# EAGLE board Fingerprint_lock1_1 (EAGLE 9.6.2)
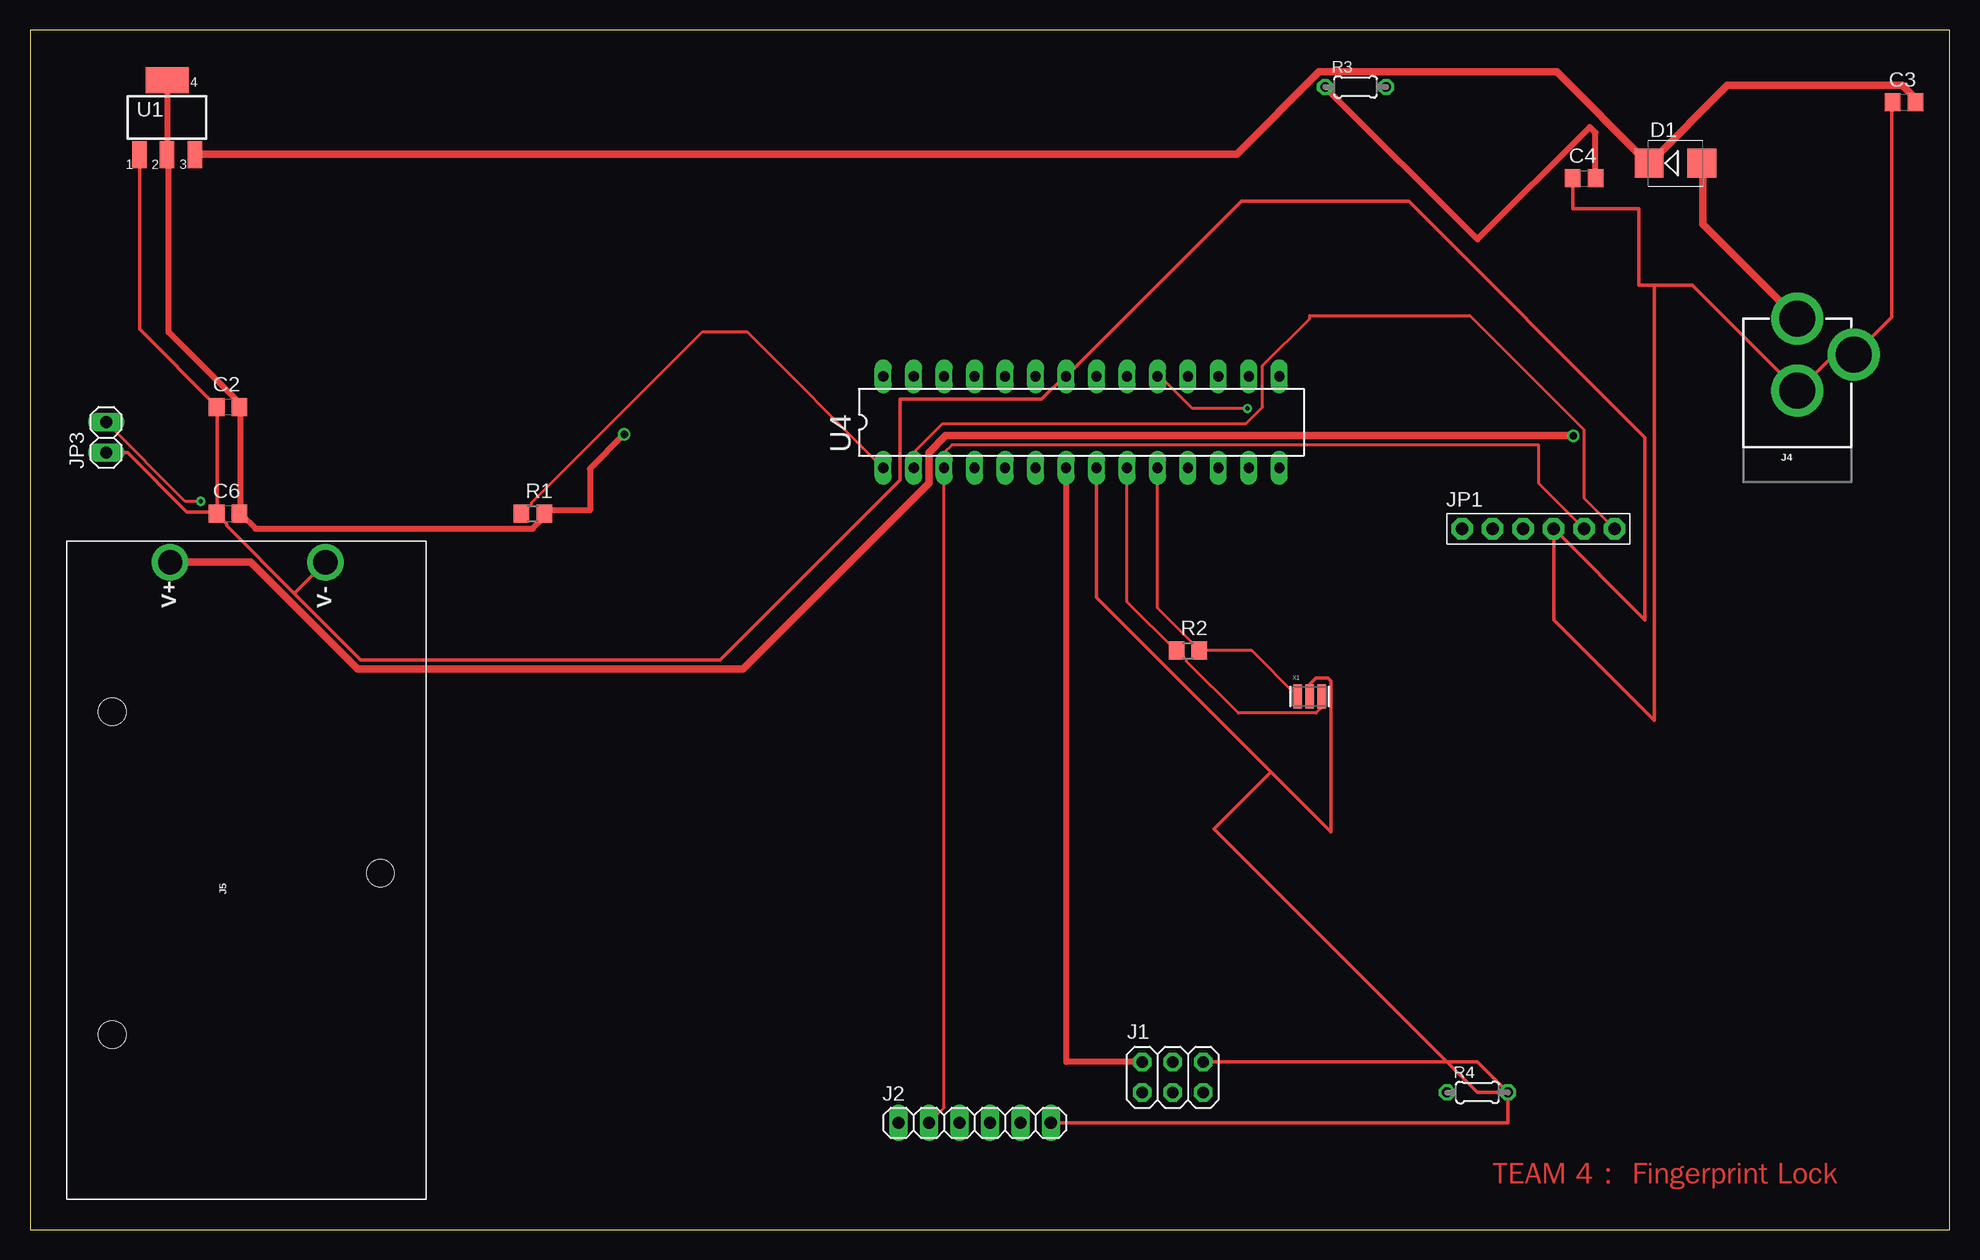
[diagram p0: board, top side]
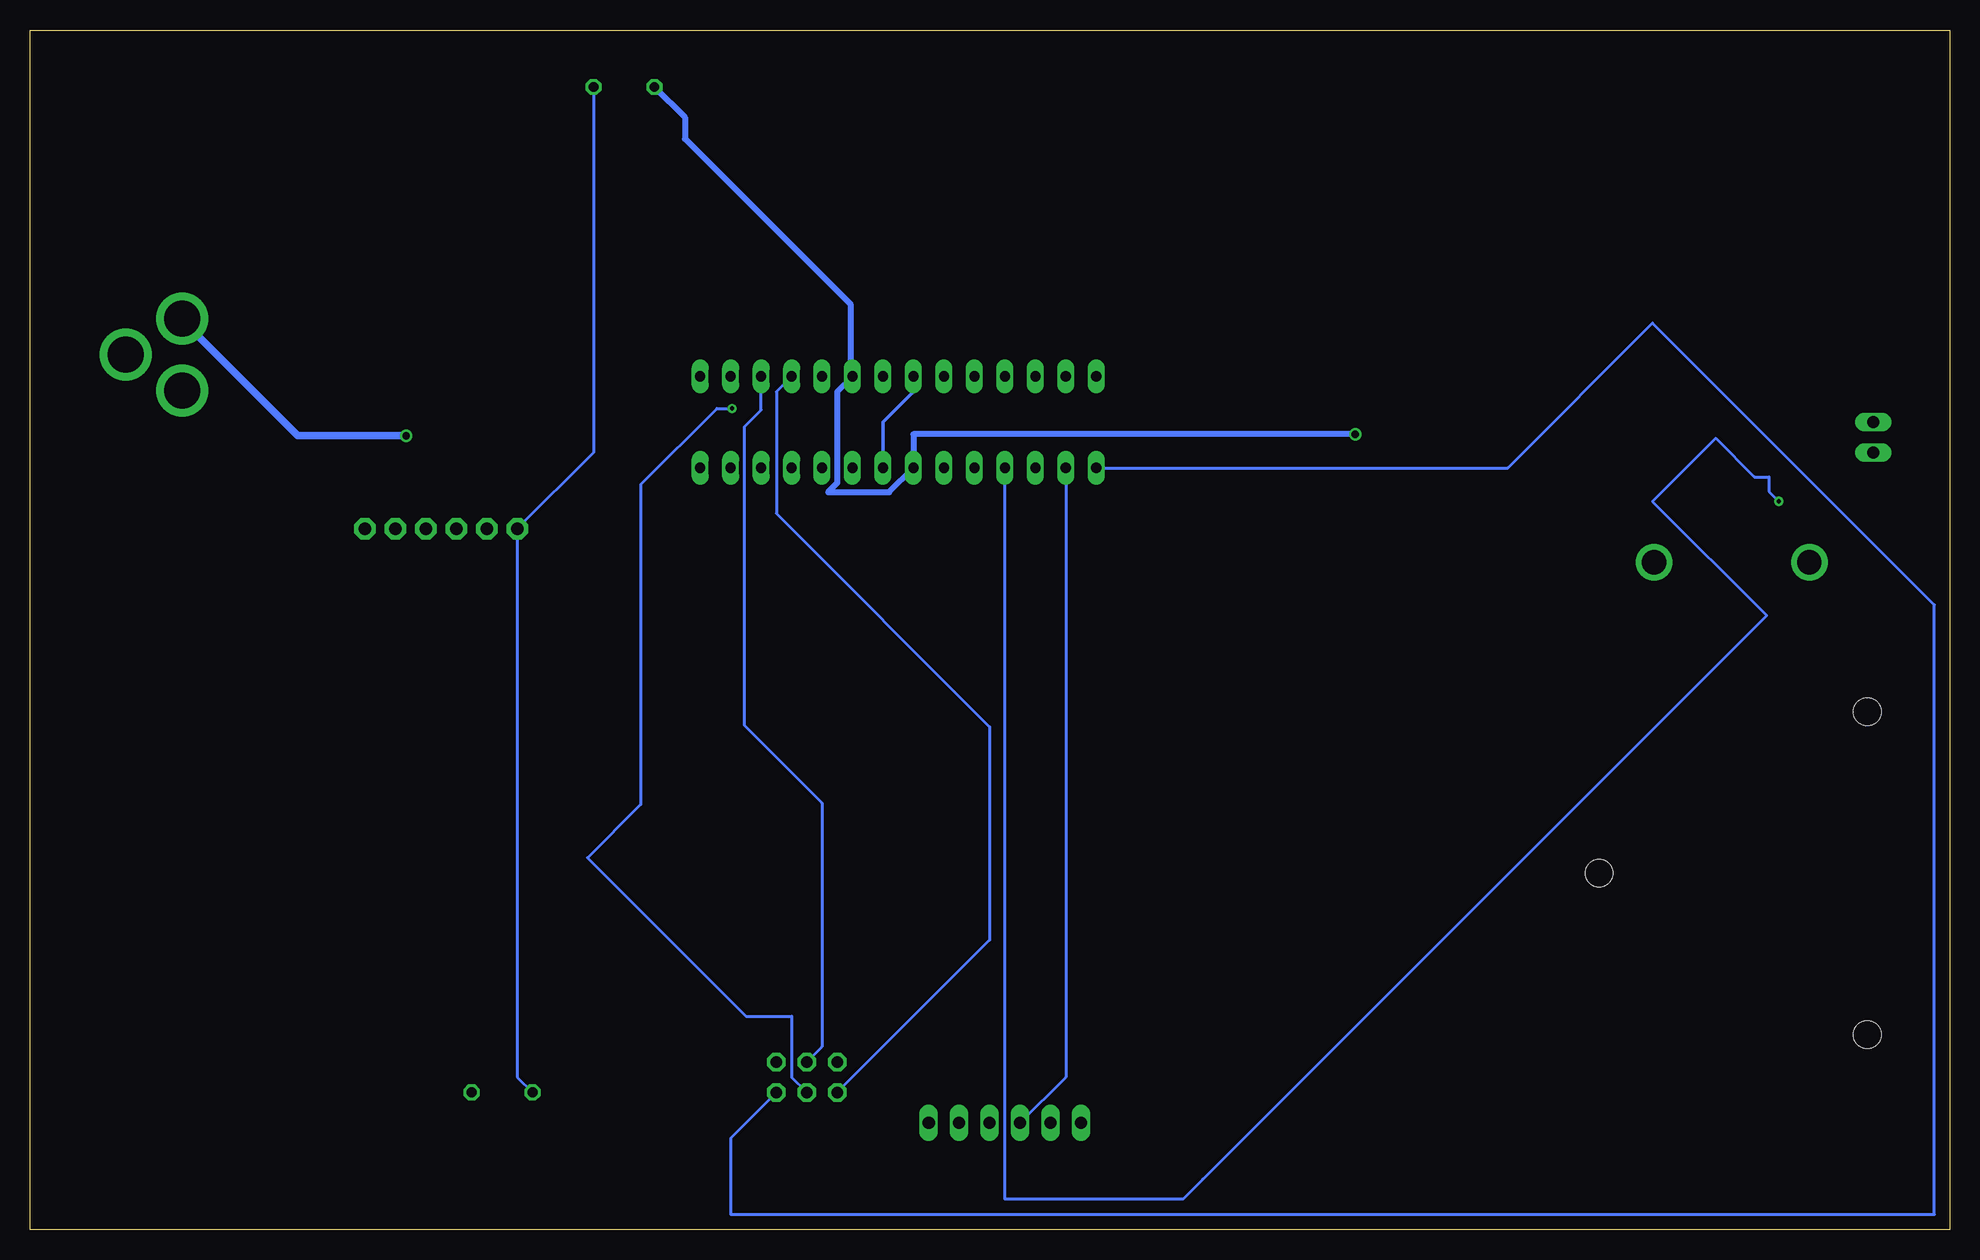
[diagram p1: board, bottom side, seen from below]

Size 160 x 100 mm. Coordinates in mm from the lower left corner, seen from the top.
Outline: 0,0 160,0 160,100 0,100 0,0
Copper layers (1*16): Top 0.035mm / dielectric 1.5mm / Bottom 0.035mm
Design rules "default": minimum track width 6mil, minimum drill 0.35mm, track to track 6mil, track to pad 6mil, pad to pad 6mil, via to via 6mil, smd to smd 6mil, copper to edge 40mil, drill to drill 6mil, minimum pad ring 10mil, minimum via ring 8mil, stop-mask expansion 4mil, vias tented up to drill 0mil, thermal gap 10mil
Net classes: 0 default: width 0.254 mm, clearance 0.254 mm; 1 power: width 0.61 mm, drill 0.61 mm, clearance 0.254 mm; 2 gnd: width 0.305 mm, drill 0.559 mm, clearance 0.254 mm; 3 usbvcc: width 0.508 mm, drill 0.61 mm, clearance 0.254 mm

## Footprints (pad centres in the part's own frame; a part is rotated, then mirrored left to right if it is on the bottom)
C0805 = smd 1.3 x 1.5: 1 -0.95,0; 2 0.95,0
SMB = smd 2.4 x 2.4: A 2.2,0; C -2.2,0
2X03 = drill 0.95 pad 1.55 octagon: 1 -2.54,-1.27; 2 -2.54,1.27; 3 0,-1.27; 4 0,1.27; 5 2.54,-1.27; 6 2.54,1.27
1X06 = drill 1.016 long: 1 -6.35,0; 2 -3.81,0; 3 -1.27,0; 4 1.27,0; 5 3.81,0; 6 6.35,0
POWER_JACK_PTH = drill 2.997 pad 4.318: GND 0,7.7; GNDBREAK 4.7,10.7; PWR 0,13.7
BC9VPC = drill 2.032: V+ 53.086,21.336; V- 53.086,8.382 | hole 2.286: 27.178,3.81; 13.716,26.162; 40.64,26.162
1X06-BIG = drill 1.016 pad 1.778 octagon: 1 -6.35,0; 2 -3.81,0; 3 -1.27,0; 4 1.27,0; 5 3.81,0; 6 6.35,0
1X02 = drill 1.016 long: 1 -1.27,0; 2 1.27,0
R0805 = smd 1.3 x 1.5: 1 -0.95,0; 2 0.95,0
0204/5 = drill 0.813 octagon: 1 -2.54,0; 2 2.54,0
SOT223 = smd 1.219 x 2.235: 1 -2.311,-3.099; 2 0,-3.099; 3 2.311,-3.099 | smd 3.6 x 2.2: 4 0,3.099
DIL28-3 = drill 0.85 pad 1.422 long: 1 -16.51,-3.81; 2 -13.97,-3.81; 3 -11.43,-3.81; 4 -8.89,-3.81; 5 -6.35,-3.81; 6 -3.81,-3.81; 7 -1.27,-3.81; 8 1.27,-3.81; 9 3.81,-3.81; 10 6.35,-3.81; 11 8.89,-3.81; 12 11.43,-3.81; 13 13.97,-3.81; 14 16.51,-3.81; 15 16.51,3.81; 16 13.97,3.81; 17 11.43,3.81; 18 8.89,3.81; 19 6.35,3.81; 20 3.81,3.81; 21 1.27,3.81; 22 -1.27,3.81; 23 -3.81,3.81; 24 -6.35,3.81; 25 -8.89,3.81; 26 -11.43,3.81; 27 -13.97,3.81; 28 -16.51,3.81
RESONATOR = smd 0.7 x 2: 1 -1,0; 2 0,0; 3 1,0

## Placement (x,y rotation side)
C2  100n  [C0805]  16.51,68.58 0 top
C3  47u  [C0805]  156.21,93.98 0 top
C4  47u  [C0805]  129.54,87.63 0 top
C6  100n  [C0805]  16.51,59.69 0 top
D1  M7  [SMB]  137.16,88.9 0 top
J1  3x2 M  [2X03]  95.25,12.7 0 top
J2  [1X06]  78.74,8.89 0 top
J4  POWER_JACK  [POWER_JACK_PTH]  147.32,62.23 0 top
J5  [BC9VPC]  33.02,2.54 90 top
JP1  [1X06-BIG]  125.73,58.42 0 top
JP3  [1X02]  6.35,66.04 90 top
R1  10K  [R0805]  41.91,59.69 0 top
R2  1M  [R0805]  96.52,48.26 0 top
R3  5K  [0204/5]  110.49,95.25 0 top
R4  10K  [0204/5]  120.65,11.43 0 top
U1  NCP1117ST50T3G  [SOT223]  11.43,92.71 0 top
U4  ATMEGA328P-PU  [DIL28-3]  87.63,67.31 0 top
X1  CSTCE16M0V53-R0 16MHZ  [RESONATOR]  106.68,44.45 0 top

## Library data of the parts
C2-C4 C6 = rcl; SPICEPREFIX: C
D1 = diode
J1 U4 X1 = SmartPrj
J2 JP3 = pinhead
J4 = SparkFun-Connectors; PROD_ID: CONN-08197
J5 = SparkFun-Connectors; PROD_ID: BATT-10855
JP1 = adafruit
R1-R4 = rcl; SPICEPREFIX: R
U1 = linear

## Nets
+5V [usbvcc]: C2.2 C4.2 C6.2 J1.2 R1.2 R3.1 U1.2 U1.4 U4.7 U4.20
GND [gnd]: C2.1 C3.1 C4.1 C6.1 J1.6 J2.6 J4.GND J4.GNDBREAK J5.V- JP1.4 JP3.1 R4.2 U1.1 U4.8 U4.22 X1.2
MISO: J1.1 U4.18
MOSI: J1.4 U4.17
N$4: JP1.1 R3.2 R4.1
PWRIN [power]: D1.A J4.PWR J5.V+
RESET: J1.5 R1.1 U4.1
RXD: J2.3 JP1.6 U4.2
SCK: J1.3 U4.19
SLOCK: JP3.2 U4.4
TXD: J2.2 JP1.5 U4.3
VIN [power]: C3.2 D1.C U1.3
XTAL1: R2.1 U4.9 X1.3
XTAL2: R2.2 U4.10 X1.1

## Tracks (layer width: path | path; a pad name or v marks a point on that pad's centre or on a via)
+5V  (via drill 0.61)
  Top 0.508: U1.4 U1.2 11.56,89.41 11.56,74.8 17.27,69.09 17.27,68.71 C2.2 17.53,68.58 17.53,59.69 C6.2 17.65,59.56 18.8,58.42 41.91,58.42 42.8,59.31 42.8,59.69 R1.2 43.11,59.94 46.67,59.94 46.67,63.43 v49.53,66.29 | C4.2 130.49,91.44 130.01,91.92 120.65,82.55 R3.1 | U4.7 86.36,13.97 J1.2
  Bottom 0.508: R3.1 105.41,92.71 105.41,90.93 91.57,77.09 91.57,71.25 U4.20 92.71,69.85 92.71,62.23 93.47,61.47 88.39,61.47 U4.7 86.36,66.29 v49.53,66.29
GND
  Top 0.305: X1.2 106.68,45.47 107.19,45.97 108.2,45.97 108.46,45.72 108.46,33.15 103.44,38.16 | J2.6 123.19,8.89 R4.2 | 103.44,38.16 98.68,33.4 120.65,11.43 R4.2 | R4.2 120.65,13.97 J1.6 | C3.1 155.19,93.98 155.19,76.07 152.15,73.03 J4.GNDBREAK 151.89,72.9 150.37,72.9 147.45,69.98 J4.GND 147.32,69.98 138.56,78.74 135.38,78.74 | 135.38,78.74 134.11,78.74 134.11,85.09 128.59,85.09 C4.1 | C6.1 15.62,59.69 15.62,68.58 C2.1 15.49,68.71 9.14,75.06 9.14,89.53 U1.1 | 22.04,53.02 27.56,47.5 57.53,47.5 72.52,62.48 72.52,69.22 84.33,69.22 86.23,71.12 U4.22 100.97,85.72 114.94,85.72 134.62,66.04 134.62,50.8 JP1.4 127,50.8 135.38,42.42 135.38,78.74 | 22.04,53.02 16.38,58.67 16.38,58.8 15.62,59.56 C6.1 | 103.44,38.16 88.9,52.7 U4.8 | JP3.1 8.13,64.77 13.08,59.82 15.49,59.82 C6.1 | 22.04,53.02 J5.V-
  Bottom 0.305: U4.22 86.36,69.85 88.9,67.31 U4.8
MISO
  Bottom 0.254: U4.18 97.79,69.85 97.79,59.69 80.01,41.91 80.01,24.13 J1.1
MOSI
  Bottom 0.254: U4.17 99.06,68.33 100.46,66.93 100.46,42.04 93.98,35.56 93.98,15.24 J1.4
N$4
  Bottom 0.254: R4.1 119.38,12.7 JP1.1 113.03,64.77 R3.2
PWRIN  (via drill 0.61)
  Top 0.61: D1.A 139.45,88.9 139.45,83.82 147.32,75.95 J4.PWR | J5.V+ 18.41,55.63 27.3,46.74 59.44,46.74 74.93,62.23 74.93,64.77 76.33,66.17 v128.65,66.17
  Bottom 0.61: v128.65,66.17 137.67,66.17 147.32,75.82 J4.PWR
RESET
  Top 0.254: U4.1 59.82,74.8 56.01,74.8 41.78,60.58 41.78,60.45 41.02,59.69 R1.1
  Bottom 0.254: J1.5 101.6,7.62 101.6,1.27 1.27,1.27 1.27,52.07 24.77,75.56 36.83,63.5 U4.1
RXD
  Top 0.254: JP1.6 129.54,60.96 129.54,66.67 120.02,76.2 106.68,76.2 106.68,75.95 102.74,72.01 102.74,68.58 101.35,67.18 76.07,67.18 73.66,64.77 U4.2
  Bottom 0.254: U4.2 73.66,12.7 J2.3
SCK  (via drill 0.35)
  Top 0.254: U4.19 94.23,71.12 96.9,68.45 v101.47,68.45
  Bottom 0.254: v101.47,68.45 102.74,68.45 109.09,62.1 109.09,35.43 113.54,30.99 100.33,17.78 96.52,17.78 96.52,12.7 J1.3
SLOCK  (via drill 0.35)
  Top 0.254: v14.22,60.71 12.95,60.71 JP3.2
  Bottom 0.254: U4.4 78.74,2.54 69.85,2.54 63.88,2.54 62.23,4.19 15.24,51.18 24.77,60.71 19.49,65.98 16.26,62.74 15.05,62.74 15.05,61.53 v14.22,60.71
TXD
  Top 0.254: J2.2 76.2,10.16 U4.3 76.2,64.77 76.83,65.41 125.73,65.41 125.73,62.23 JP1.5
VIN
  Top 0.61: C3.2 157.1,93.98 157.1,94.36 156.08,95.38 141.48,95.38 135,88.9 D1.C 134.75,89.03 127.25,96.52 107.44,96.52 100.58,89.66 13.84,89.66 U1.3
XTAL1
  Top 0.254: X1.3 107.57,44.45 107.57,43.43 107.19,43.05 100.71,43.05 96.39,47.37 96.39,47.5 95.63,48.26 R2.1 95.5,48.26 91.44,52.32 U4.9
XTAL2
  Top 0.254: 97.54,48.26 101.85,48.26 105.66,44.45 X1.1 | U4.10 93.98,51.82 97.54,48.26 | 97.54,48.26 R2.2

## Text on the board
Top: TEAM 4： Fingerprint Lock